# EAGLE board ATmega328-SPI_test_board (EAGLE 7.6.0)
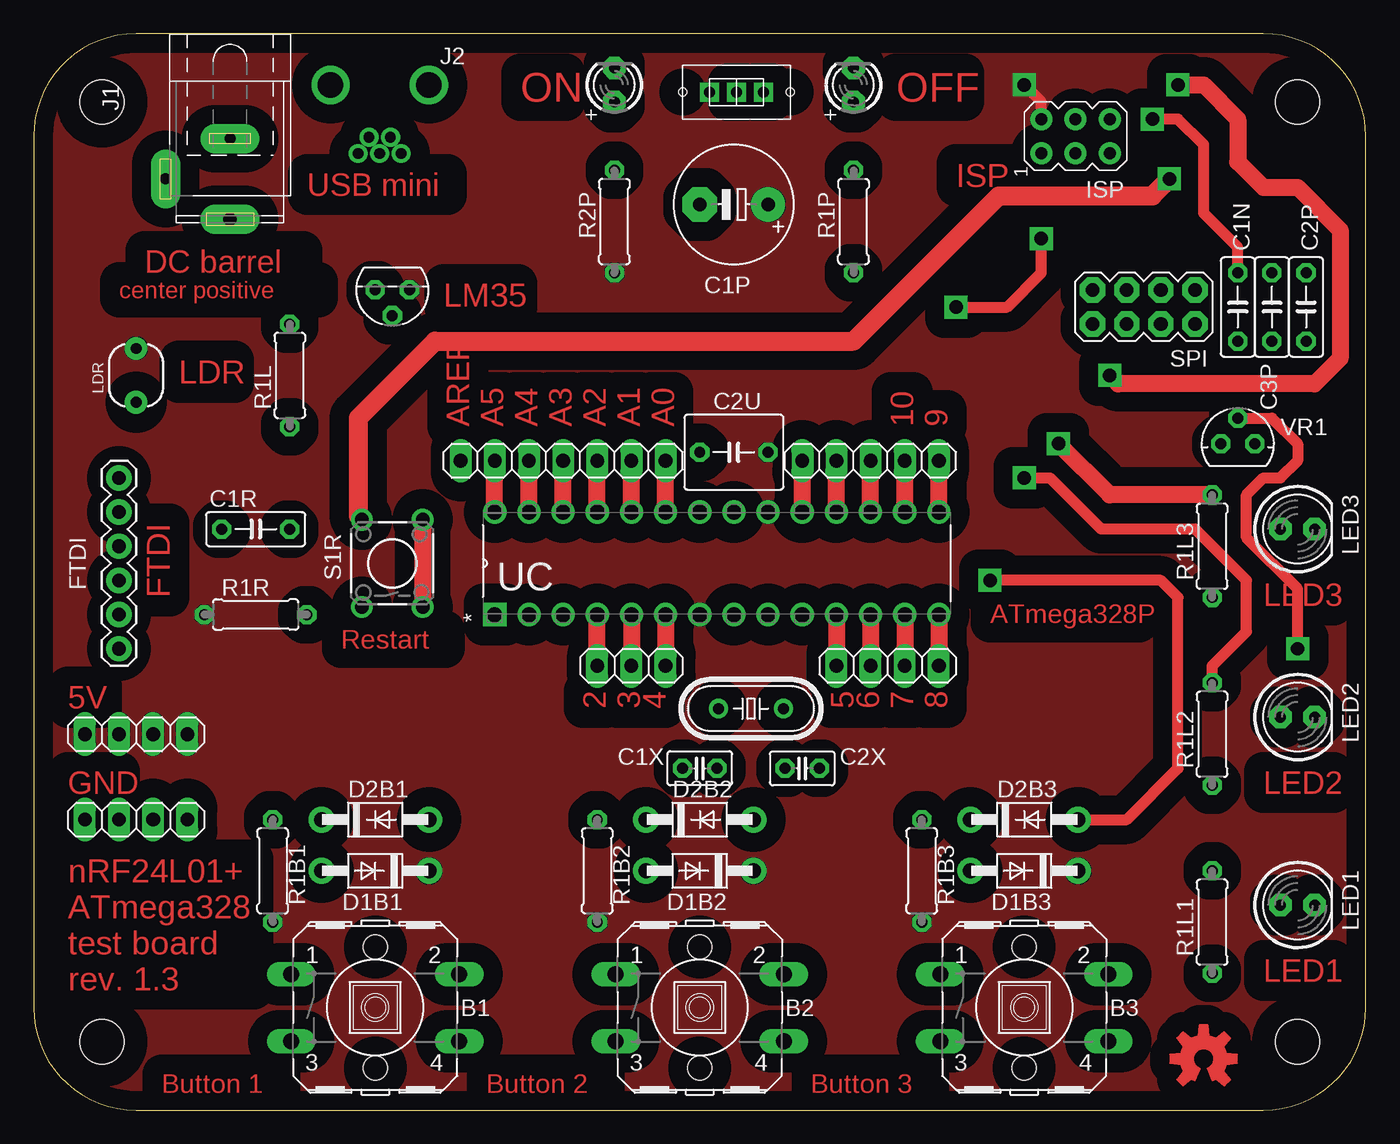
[diagram p0: board, top side]
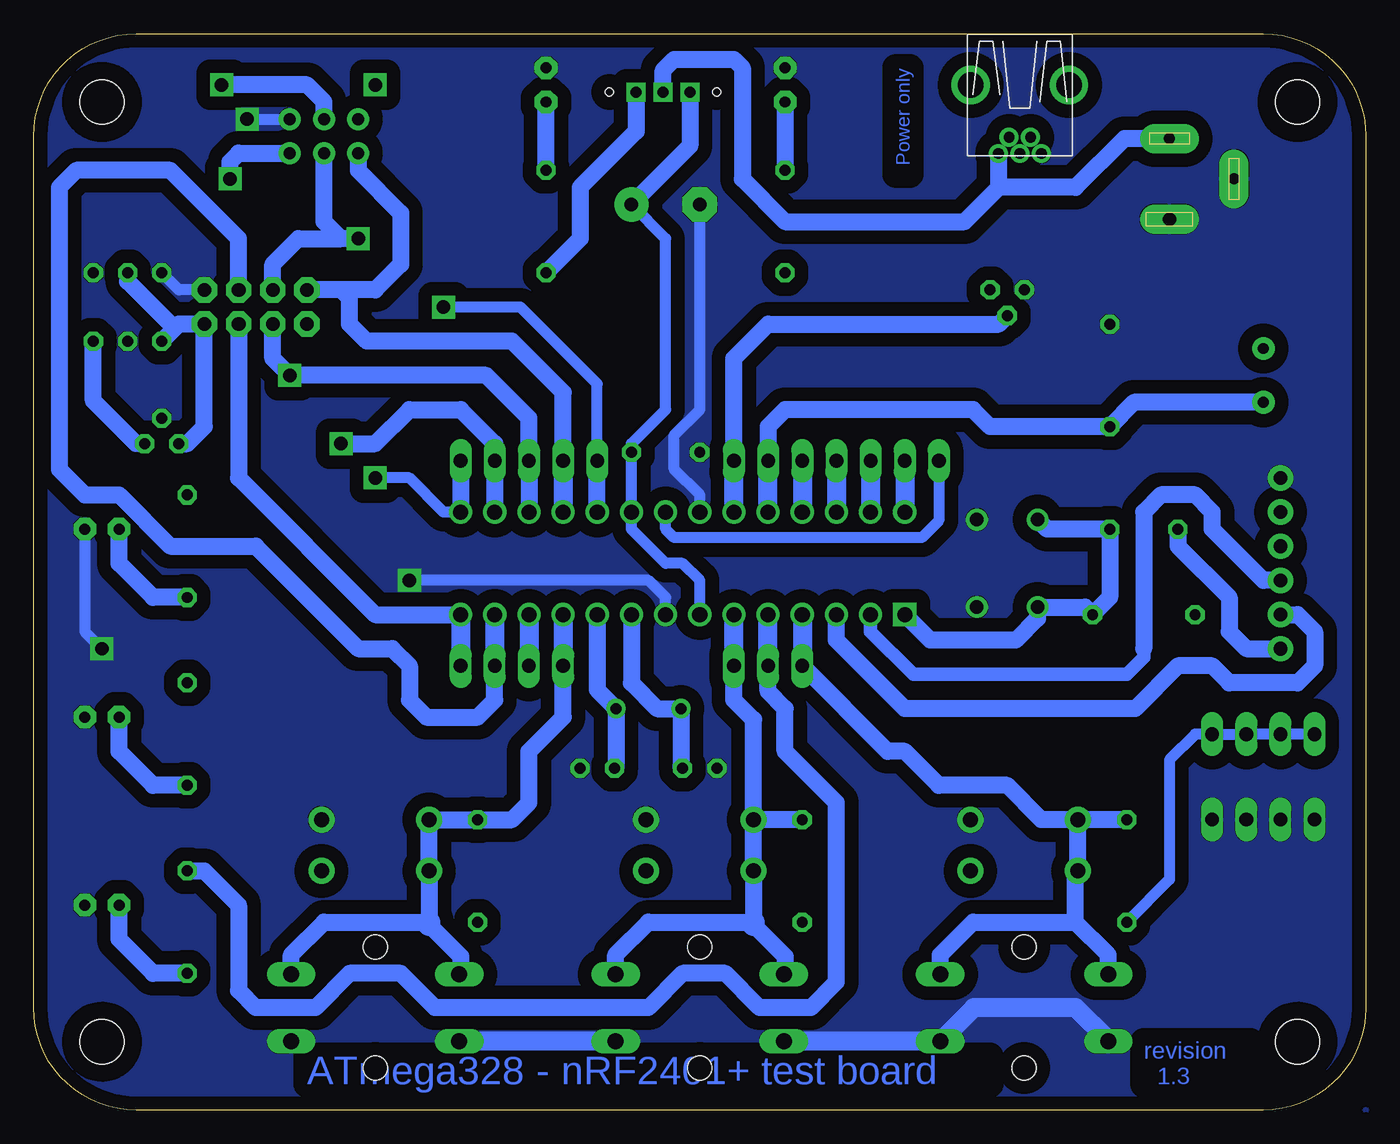
[diagram p1: board, bottom side, seen from below]

Size 99.06 x 80.01 mm. Coordinates in mm from the lower left corner, seen from the top.
Outline: 7.62,0 91.44,0 arc90 99.06,7.62 99.06,72.39 arc90 91.44,80.01 7.62,80.01 arc90 0,72.39 0,7.62 arc90 7.62,0
Copper layers (1*16): Top 0.035mm / dielectric 1.5mm / Bottom 0.035mm
Design rules "VaSe7u - Toner transfer method *": minimum track width 16mil, minimum drill 0.8mm, track to track 12mil, track to pad 12mil, pad to pad 10mil, via to via 12mil, smd to smd 8mil, copper to edge 20mil, drill to drill 8mil, minimum pad ring 12mil, minimum via ring 14mil, stop-mask expansion 4mil, vias tented up to drill 0mil, thermal gap 2mil

## Footprints (pad centres in the part's own frame; a part is rotated, then mirrored left to right if it is on the bottom)
B3F-40XX = drill 1.194 long: 1 -6.248,2.489; 2 6.248,2.489; 3 -6.248,-2.489; 4 6.248,-2.489 | hole 1.803: 0,-4.496; 0,4.496
C050-025X075 = drill 0.813 octagon: 1 -2.54,0; 2 2.54,0
E5-8,5 = drill 1.016 pad 2.54: + -2.54,0 | drill 1.016 pad 2.54 octagon: - 2.54,0
C025-025X050 = drill 0.813 octagon: 1 -1.27,0; 2 1.27,0
C050-055X075 = drill 0.813 octagon: 1 -2.54,0; 2 2.54,0
DO41-7 = drill 1.118 pad 1.93: A 4,0; C -4,0
FTDI_BASIC = drill 1.016 pad 1.88: CTS 10.16,0; DTR 0,0; GND 12.7,0; RXI 2.54,0; TXO 5.08,0; VCC 7.62,0
STAND-OFF = hole 3.302: 0,0
1X03 = drill 1.016 long: 1 -2.54,0; 2 0,0; 3 2.54,0
1X04 = drill 1.016 long: 1 -3.81,0; 2 -1.27,0; 3 1.27,0; 4 3.81,0
1X05 = drill 1.016 long: 1 -5.08,0; 2 -2.54,0; 3 0,0; 4 2.54,0; 5 5.08,0
1X07 = drill 1.016 long: 1 -7.62,0; 2 -5.08,0; 3 -2.54,0; 4 0,0; 5 2.54,0; 6 5.08,0; 7 7.62,0
AVRISP = drill 0.9 pad 1.626: 1 -1.27,2.54; 2 1.27,2.54; 3 -1.27,0; 4 1.27,0; 5 -1.27,-2.54; 6 1.27,-2.54
SPC4078 = drill 0.8 pad 2.184 long: 1 -3,0; 2 0,-4.8 | drill 1 pad 2.184 long: 3 3,0
USB-MB-H = drill 0.8: D+ 5.1,0; D- 3.9,0.8; GND 5.1,-1.6; ID 3.9,-0.8; VBUS 5.1,1.6 | drill 1.9: GND@1 0,3.65; GND@2 0,-3.65
PHOTOCELL = drill 0.8 pad 1.676: 1 -2,0; 2 2,0
LED5MM = drill 0.813 pad 1.676 octagon: A -1.27,0; K 1.27,0
LED3MM = drill 0.813 pad 1.676 octagon: A -1.27,0; K 1.27,0
0207/7 = drill 0.813 octagon: 1 -3.81,0; 2 3.81,0
TACTILE-PTH = drill 1.016: 1 -3.251,2.261; 2 3.251,2.261; 3 -3.251,-2.261; 4 3.251,-2.261
2X4 = drill 1.016 pad 1.88 octagon: 1 -3.81,-1.27; 2 -3.81,1.27; 3 -1.27,-1.27; 4 -1.27,1.27; 5 1.27,-1.27; 6 1.27,1.27; 7 3.81,-1.27; 8 3.81,1.27
SWITCH_2MM = drill 0.8 square: 1 2,2; 2 4,2; 3 6,2 | hole 0.6: 0,2; 8,2
TO92 = drill 0.813 octagon: 1 -1.27,0; 2 0,1.905; 3 1.27,0
DIP254P762X457-28 = drill 1.118 square: 1 -7.62,33.02 | drill 1.118: 2 -7.62,30.48; 3 -7.62,27.94; 4 -7.62,25.4; 5 -7.62,22.86; 6 -7.62,20.32; 7 -7.62,17.78; 8 -7.62,15.24; 9 -7.62,12.7; 10 -7.62,10.16; 11 -7.62,7.62; 12 -7.62,5.08; 13 -7.62,2.54; 14 -7.62,0; 15 0,0; 16 0,2.54; 17 0,5.08; 18 0,7.62; 19 0,10.16; 20 0,12.7; 21 0,15.24; 22 0,17.78; 23 0,20.32; 24 0,22.86; 25 0,25.4; 26 0,27.94; 27 0,30.48; 28 0,33.02
78LXX = drill 0.813 octagon: GND 0,1.905; IN 1.27,0; OUT -1.27,0
HC49/S = drill 0.813: 1 -2.413,0; 2 2.413,0

## Placement (x,y rotation side)
B1  [B3F-40XX]  25.4,7.62 0 top
B2  [B3F-40XX]  49.53,7.62 0 top
B3  [B3F-40XX]  73.66,7.62 0 top
C1N  [C050-025X075]  89.53,59.69 270 top
C1P  [E5-8,5]  52.07,67.31 180 top
C1R  100n  [C050-025X075]  16.51,43.18 0 top
C1X  22p  [C025-025X050]  49.53,25.4 180 top
C2P  [C050-025X075]  94.61,59.69 90 top
C2U  [C050-055X075]  52.07,48.9 180 top
C2X  22p  [C025-025X050]  57.15,25.4 0 top
C3P  [C050-025X075]  92.08,59.69 270 top
D1B1  [DO41-7]  25.4,17.78 180 top
D1B2  [DO41-7]  49.53,17.78 180 top
D1B3  [DO41-7]  73.66,17.78 180 top
D2B1  [DO41-7]  25.4,21.59 0 top
D2B2  [DO41-7]  49.53,21.59 0 top
D2B3  [DO41-7]  73.66,21.59 0 top
FTDI  FTDI  [FTDI_BASIC]  6.35,34.29 90 top
H1  STAND-OFF  [STAND-OFF]  5.08,5.08 0 top
H1U  [1X03]  44.45,33.02 0 top
H2  STAND-OFF  [STAND-OFF]  93.98,5.08 0 top
H2U  [1X04]  63.5,33.02 0 top
H3  STAND-OFF  [STAND-OFF]  93.98,74.93 0 top
H3U  [1X05]  62.23,48.26 180 top
H4  STAND-OFF  [STAND-OFF]  5.08,74.93 0 top
H4U  [1X07]  39.37,48.26 180 top
HPM  GND  [1X04]  7.62,21.59 0 top
HPP  5V  [1X04]  7.62,27.94 0 top
ISP  AVRISP-6  [AVRISP]  77.47,72.39 90 top
J1  DC jack  [SPC4078]  14.61,69.22 270 top
J2  USB mini  [USB-MB-H]  25.73,76.2 270 top
LDR  LDR  [PHOTOCELL]  7.62,54.61 90 top
LED1  [LED5MM]  93.98,15.24 0 top
LED2  [LED5MM]  93.98,29.21 0 top
LED3  [LED5MM]  93.98,43.18 0 top
LOGO1  OSHW-LOGOM-COPPER  [OSHW-LOGO-M_COPPER]  87,3.81 0 top
OFF  OFF  [LED3MM]  60.96,76.2 90 top
ON  ON  [LED3MM]  43.18,76.2 90 top
R1B1  10k  [0207/7]  17.78,17.78 90 top
R1B2  10k  [0207/7]  41.91,17.78 90 top
R1B3  10k  [0207/7]  66.04,17.78 90 top
R1L  47k  [0207/7]  19.05,54.61 270 top
R1L1  [0207/7]  87.63,13.97 90 top
R1L2  [0207/7]  87.63,27.94 90 top
R1L3  [0207/7]  87.63,41.91 90 top
R1P  [0207/7]  60.96,66.04 270 top
R1R  10k  [0207/7]  16.51,36.83 180 top
R2P  [0207/7]  43.18,66.04 270 top
S1R  Restart  [TACTILE-PTH]  26.67,40.64 90 top
SPI  nRF24L01+  [2X4]  82.55,59.69 180 top
SW1  Power switch  [SWITCH_2MM]  48.26,73.66 0 top
T  LM35  [TO92]  26.67,60.96 180 top
UC  ATmega328P  [DIP254P762X457-28]  67.31,44.45 90 top
VR1  [78LXX]  89.53,49.53 0 top
XTAL  16MHz  [HC49/S]  53.34,29.84 0 top

## Library data of the parts
B1-B3 = switch-omron; MF: OMRON COMPONENTS USA; MPN: B3F-4000; OC_FARNELL: 176434; OC_NEWARK: 36K3105
C1N C1R C1X C2P C2X C3P R1B1-R1B3 R1L R1L1-R1L3 R1P R1R R2P = resistor
C1P C2U = rcl
D1B1-D1B3 D2B1-D2B3 ISP LED1-LED3 OFF ON = adafruit
FTDI = SparkFun-Connectors
H1-H4 = SparkFun-Electromechanical
H1U H2U H3U H4U HPM HPP = pinhead
J1 = con-jack; OC_FARNELL: unknown; OC_NEWARK: unknown
J2 = con-usb-2
LDR = SparkFun-Sensors
LOGO1 = SparkFun-Aesthetics
S1R = SparkFun
SPI = SparkFun-Connectors; MF: OLIMEX; MPN: MOD-NRF24LR; OC_FARNELL: 1701547
SW1 = VaSe7u - Switches
T = LM35
UC = Atmel by Element14 (batch 1); MPN: ATMEGA328P-PU; OC_FARNELL: 1715487; OC_NEWARK: 15R0268; PACKAGE: PDIP-28; SUPPLIER: Atmel
VR1 = v-reg
XTAL = crystal; OC_FARNELL: 1667008; OC_NEWARK: unknown

## Nets
2: B1.1 B1.2 D1B1.A D2B1.C H1U.1 R1B1.2 UC.4
3: H1U.2 R1L1.2 UC.5
4: B2.1 B2.2 D1B2.A D2B2.C H1U.3 R1B2.2 UC.6
5: B3.1 B3.2 D1B3.A D2B3.C H2U.1 R1B3.2 UC.11
5V: C1P.+ C2U.1 D1B1.C D1B2.C D1B3.C FTDI.VCC HPP.1 HPP.2 HPP.3 HPP.4 ISP.2 LDR.2 R1B1.1 R1B2.1 R1B3.1 R1R.2 R2P.2 SW1.1 T.1 UC.7 UC.20
6: H2U.2 UC.12
9: H3U.1 R1L2.2 UC.15
10: H3U.2 R1L3.2 UC.16
+3V3: C1N.2 C3P.1 SPI.2 VR1.OUT
A0: H4U.1 T.2 UC.23
A1: H4U.2 LDR.1 R1L.2 UC.24
A2: H4U.3 UC.25
A3: H4U.4 UC.26
A4: H4U.5 UC.27
A5: H4U.6 UC.28
AREF: H4U.7 UC.21
CE: H2U.3 SPI.3 UC.13
CSN: H2U.4 SPI.4 UC.14
GND: B1.3 B1.4 B2.3 B2.4 B3.3 B3.4 C1N.1 C1P.- C1X.2 C2P.2 C2U.2 C2X.2 C3P.2 D2B1.A D2B2.A D2B3.A FTDI.GND HPM.1 HPM.2 HPM.3 HPM.4 ISP.6 J1.2 J1.3 J2.GND LED1.K LED2.K LED3.K OFF.K ON.K R1L.1 S1R.3 S1R.4 SPI.1 T.3 UC.8 UC.22 VR1.GND
MISO: H3U.4 ISP.1 SPI.7 UC.18
MOSI: H3U.3 ISP.4 SPI.6 UC.17
N$5: LED1.A R1L1.1
N$6: ON.A R2P.1
N$7: C1R.1 FTDI.DTR
N$11: OFF.A R1P.1
N$13: R1P.2 SW1.3
N$14: LED2.A R1L2.1
N$16: LED3.A R1L3.1
RESET: C1R.2 ISP.5 R1R.1 S1R.1 S1R.2 UC.1
SCK: H3U.5 ISP.3 SPI.5 UC.19
URX: FTDI.TXO UC.2
UTX: FTDI.RXI UC.3
V+: J1.1 J2.VBUS SW1.2
VCC: C2P.1 VR1.IN
XTAL1: C1X.1 UC.9 XTAL.1
XTAL2: C2X.1 UC.10 XTAL.2

## Tracks (layer width: path | path; a pad name or v marks a point on that pad's centre or on a via)
2
  Top 1.27: H1U.1 UC.4
  Bottom 1.27: R1B1.2 D2B1.C | B1.1 19.15,11.53 21.59,13.97 | 21.59,13.97 21.59,17.59 | D1B1.A D2B1.C | D2B1.C 24.13,21.59 26.67,24.13 31.75,24.13 34.29,26.67 35.56,26.67 H1U.1 | B1.2 31.65,11.53 29.21,13.97 21.59,13.97
  Bottom 1.422: UC.4 H1U.1 | 21.59,17.59 D1B1.A | B1.2 31.7,10.11 31.75,10.16 31.7,10.16 B1.2
3
  Top 1.27: UC.5 H1U.2
  Bottom 1.27: R1L1.2 86.36,17.78 83.82,15.24 83.82,8.89 82.55,7.62 78.11,7.62 75.56,10.16 71.75,10.16 69.22,7.62 53.34,7.62 50.8,10.16 47.62,10.16 45.09,7.62 41.27,7.62 39.37,9.53 39.37,22.86 43.18,26.67 43.18,29.84 44.45,31.11 H1U.2
  Bottom 1.422: H1U.2 UC.5
4
  Top 1.27: UC.6 H1U.3
  Bottom 1.27: D2B2.C D1B2.A 45.53,13.97 53.34,13.97 55.78,11.53 B2.2 | D2B2.C 45.53,29.02 46.99,30.48 H1U.3 | 45.53,13.78 43.18,11.43 43.18,10.21 B2.1 | R1B2.2 D2B2.C
  Bottom 1.422: H1U.3 UC.6
  Bottom 1.676: 45.53,13.97 45.53,13.78
5
  Top 1.27: UC.11 H2U.1
  Bottom 1.27: H2U.1 59.69,29.21 62.23,26.67 62.23,22.86 63.5,21.59 R1B3.2 D2B3.C D1B3.A 69.66,13.97 77.47,13.97 79.91,11.53 B3.2 | 69.66,13.78 67.31,11.43 67.31,10.21
  Bottom 1.422: UC.11 H2U.1
  Bottom 1.676: 69.66,13.97 69.66,13.78 | 67.31,10.21 B3.1
5V  (via drill 1)
  Top 0.813: ISP.2 74.93,74.93 v73.66,76.2
  Bottom 0.813: C1P.+ 52.07,64.77 52.07,52.07 54.61,49.53 C2U.1 UC.20 54.61,43.18 52.07,40.64 50.8,40.64 49.53,39.37 UC.7 | HPP.1 HPP.2 HPP.3 HPP.4 12.7,27.94 14.61,26.04 14.61,17.14 R1B1.1
  Bottom 1.27: SW1.1 50.26,71.66 C1P.+
  pour Top (isolate 1.422): -2.54,81.28 100.33,81.28 100.33,-2.54 -2.54,-2.54
6
  Top 1.27: UC.12 H2U.2
  Bottom 1.422: UC.12 H2U.2
9  (via drill 1)
  Top 0.813: v73.66,46.99 75.56,46.99 79.38,43.18 86.36,43.18 90.17,39.37 90.17,35.56 87.63,33.02 R1L2.2
  Top 1.27: UC.15 H3U.1
  Bottom 0.813: UC.15 68.58,44.45 71.12,46.99 v73.66,46.99
  Bottom 1.27: H3U.1 UC.15
10  (via drill 1)
  Top 1.27: R1L3.2 80.01,45.72 v76.2,49.53 | UC.16 H3U.2
  Bottom 1.27: UC.16 H3U.2 64.77,49.53 67.31,52.07 71.12,52.07 73.66,49.53 v76.2,49.53
+3V3
  Bottom 1.27: 88.58,58.1 88.27,58.42 SPI.2 86.36,50.8 87.63,49.53 VR1.OUT | 88.58,58.1 C1N.2 | C3P.1 92.08,61.59 88.58,58.1
A0
  Top 1.27: UC.23 H4U.1
  Bottom 1.27: H4U.1 46.99,55.88 44.45,58.42 27.3,58.42 T.2
  Bottom 1.422: UC.23 H4U.1
A1
  Top 1.27: UC.24 H4U.2
  Bottom 1.27: LDR.1 17.24,52.61 R1L.2 27.94,50.8 29.21,52.07 43.18,52.07 44.45,50.8 H4U.2
  Bottom 1.422: UC.24 H4U.2
A2
  Top 1.27: UC.25 H4U.3
  Bottom 1.422: H4U.3 UC.25
A3
  Top 1.27: UC.26 H4U.4
  Bottom 1.422: H4U.4 UC.26
A4
  Top 1.27: UC.27 H4U.5
  Bottom 1.422: H4U.5 UC.27
A5
  Top 1.27: UC.28 H4U.6
  Bottom 1.422: H4U.6 UC.28
AREF
  Bottom 0.813: H4U.7 31.75,43.81 33.02,42.55 51.44,42.55 52.07,43.18 UC.21
CE
  Top 1.27: UC.13 H2U.3
  Bottom 1.27: H2U.3 64.77,30.48 66.04,29.21 69.85,29.21 71.12,30.48 71.12,33.02 72.39,34.29 74.93,34.29 82.55,41.91 88.9,41.91 92.71,45.72 95.25,45.72 97.16,47.62 97.16,68.58 95.89,69.85 88.9,69.85 83.82,64.77 SPI.3
  Bottom 1.422: UC.13 H2U.3
CSN
  Top 1.27: UC.14 H2U.4
  Bottom 1.27: SPI.4 83.82,46.99 73.66,36.83 UC.14
  Bottom 1.422: UC.14 H2U.4
GND  (via drill 1)
  Top 0.813: v93.98,34.29 93.98,38.73 90.17,42.55 90.17,45.72 91.44,46.99 92.71,46.99 93.98,48.26 93.98,49.53 92.08,51.44 VR1.GND | D2B3.A 81.28,21.59 85.09,25.4 85.09,38.1 83.82,39.37 v71.12,39.37 | C1N.1 89.53,64.14 87,66.67 87,71.75 85.09,73.66 v83.19,73.66
  Top 1.27: S1R.4 S1R.3
  Bottom 0.813: LED3.K 95.25,35.56 v93.98,34.29 | UC.22 49.53,45.72 51.44,47.62 51.44,50.16 49.53,52.07 C1P.- | UC.8 52.07,38.1 53.34,39.37 v71.12,39.37 | SPI.1 88.27,60.96 C1N.1 | v83.19,73.66 ISP.6
  Bottom 1.422: B1.3 19.15,5.18 21.59,7.62 29.16,7.62 B1.4 B2.3 | B2.4 B3.3
  pour Bottom (isolate 1.016): -1.27,82.55 101.6,82.55 101.6,-1.27 -1.27,-1.27
MISO
  Top 1.27: UC.18 H3U.4
  Bottom 1.27: ISP.1 74.93,69.85 71.75,66.67 71.75,62.87 73.66,60.96 76.2,60.96 | 76.2,60.96 SPI.7 | H3U.4 59.69,53.34 63.5,57.15 74.3,57.15 75.56,58.42 75.56,60.33 76.2,60.96
  Bottom 1.422: H3U.4 UC.18
MOSI  (via drill 1)
  Top 1.27: v80.01,54.61 80.64,53.98 95.25,53.98 97.16,55.88 97.16,65.41 93.98,68.58 91.44,68.58 89.53,70.48 89.53,73.66 87,76.2 v85.09,76.2 | UC.17 H3U.3
  Bottom 1.27: UC.17 H3U.3 62.23,51.44 65.41,54.61 v80.01,54.61 81.28,55.88 SPI.6 | ISP.4 77.47,74.93 78.74,76.2 v85.09,76.2
N$1
  pour Bottom: 0.06,-0.14 arc9 0.08,-0.13 0.14,-0.18 0.18,-0.14 0.13,-0.08 arc19 0.15,-0.03 0.22,-0.03 0.22,0.03 0.15,0.03 arc19 0.13,0.08 0.18,0.14 0.14,0.18 0.08,0.13 arc19 0.03,0.15 0.03,0.22 -0.03,0.22 -0.03,0.15 arc19 -0.08,0.13 -0.14,0.18 -0.18,0.14 -0.13,0.08 arc19 -0.15,0.03 -0.22,0.03 -0.22,-0.03 -0.15,-0.03 arc19 -0.13,-0.08 -0.18,-0.14 -0.14,-0.18 -0.08,-0.13 arc9 -0.06,-0.14 -0.03,-0.06 arc-68 -0.07,0 arc-247 0.03,-0.06
N$5
  Bottom 1.27: R1L1.1 90.17,10.16 92.71,12.7 LED1.A
N$6
  Bottom 1.27: ON.A R2P.1
N$7
  Bottom 1.27: C1R.1 13.97,41.91 10.16,38.1 10.16,35.56 8.89,34.29 FTDI.DTR
N$11
  Bottom 1.27: R1P.1 OFF.A
N$13
  Bottom 1.27: SW1.3 54.26,72.74 58.42,68.58 58.42,64.77 R1P.2
N$14
  Bottom 1.27: R1L2.1 90.17,24.13 92.71,26.67 LED2.A
N$16
  Bottom 1.27: R1L3.1 90.17,38.1 92.71,40.64 LED3.A
RESET  (via drill 1)
  Top 1.422: S1R.2 24.13,44.17 24.13,51.44 29.84,57.15 60.96,57.15 71.75,67.94 73.03,67.94 73.66,67.94 83.19,67.94 v84.45,69.22
  Bottom 1.27: S1R.2 23.7,43.18 C1R.2 19.05,38.1 R1R.1 20.88,37.39 S1R.1 24.41,36.55 26.04,34.92 32.38,34.92 UC.1 | v84.45,69.22 84.45,70.48 83.82,71.12 ISP.5
SCK  (via drill 1)
  Top 0.813: v68.58,59.69 72.39,59.69 74.93,62.23 v74.93,64.77
  Top 1.27: UC.19 H3U.5
  Bottom 0.813: H3U.5 57.15,53.98 62.87,59.69 v68.58,59.69
  Bottom 1.27: UC.19 H3U.5 | v74.93,64.77 76.2,64.77 | 76.2,64.77 77.47,66.04 ISP.3 | SPI.5 81.28,62.87 79.38,64.77 76.2,64.77
URX
  Bottom 1.016: 16.51,34.29 16.51,33.66 17.78,32.38 33.66,32.38 36.83,35.56 UC.2
  Bottom 1.27: FTDI.TXO 7.62,39.37 11.43,43.18 11.43,44.45 12.7,45.72 15.24,45.72 16.51,44.45 16.51,34.29
UTX
  Bottom 1.27: FTDI.RXI 5.08,36.83 3.81,35.56 3.81,33.02 5.08,31.75 10.16,31.75 11.43,33.02 13.97,33.02 17.14,29.84 34.29,29.84 39.37,34.92 UC.3
V+
  Bottom 1.27: SW1.2 52.26,77.28 51.44,78.11 46.99,78.11 46.35,77.47 46.35,69.22 43.18,66.04 29.84,66.04 27.3,68.58 | 27.3,68.58 27.3,71.08 J2.VBUS | J1.1 17.95,72.22 21.59,68.58 27.3,68.58
VCC
  Bottom 1.27: VR1.IN 91.44,49.53 94.61,52.7 C2P.1
XTAL1
  Bottom 1.27: C1X.1 50.93,25.53 XTAL.1 52.7,29.84 54.61,31.75 UC.9
XTAL2
  Bottom 1.27: UC.10 57.15,31.24 XTAL.2 55.75,25.53 C2X.1

## Text on the board
Top: ON | OFF | ISP | USB mini | DC barrel | center positive | LM35 | LDR | AREF | A5 | A4 | A3 | A2 | A1 | A0 | 10 | 9 | FTDI | LED3 | ATmega328P | Restart | 5V | 2 | 3 | 4 | 5 | 6 | 7 | 8 | GND | LED2 | LED1 | nRF24L01+ / ATmega328 / test board / rev. 1.3 | Button 1 | Button 2 | Button 3
Bottom: Power only | revision / 1.3 | ATmega328 - nRF2401+ test board